# Altium PCB pcb.PcbDoc
Units mil, origin at the board's own origin, x right, y up, seen from the top; angles counter-clockwise.
Board outline 6000 x 4000 mil, 2 copper layers (Top Layer, Bottom Layer); 96 components, 60 nets, 327 pads, 0 vias.
Unrouted connection lines stored in the file: 201.
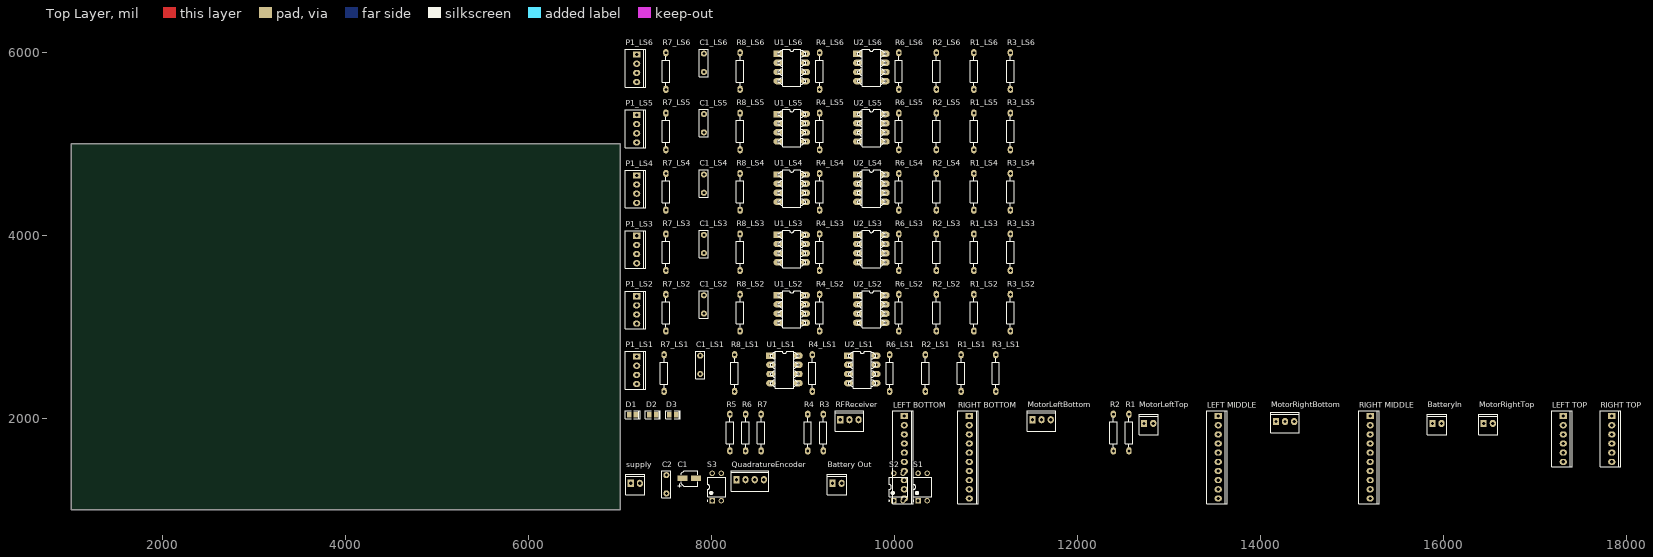
[diagram p0: Top Layer view]
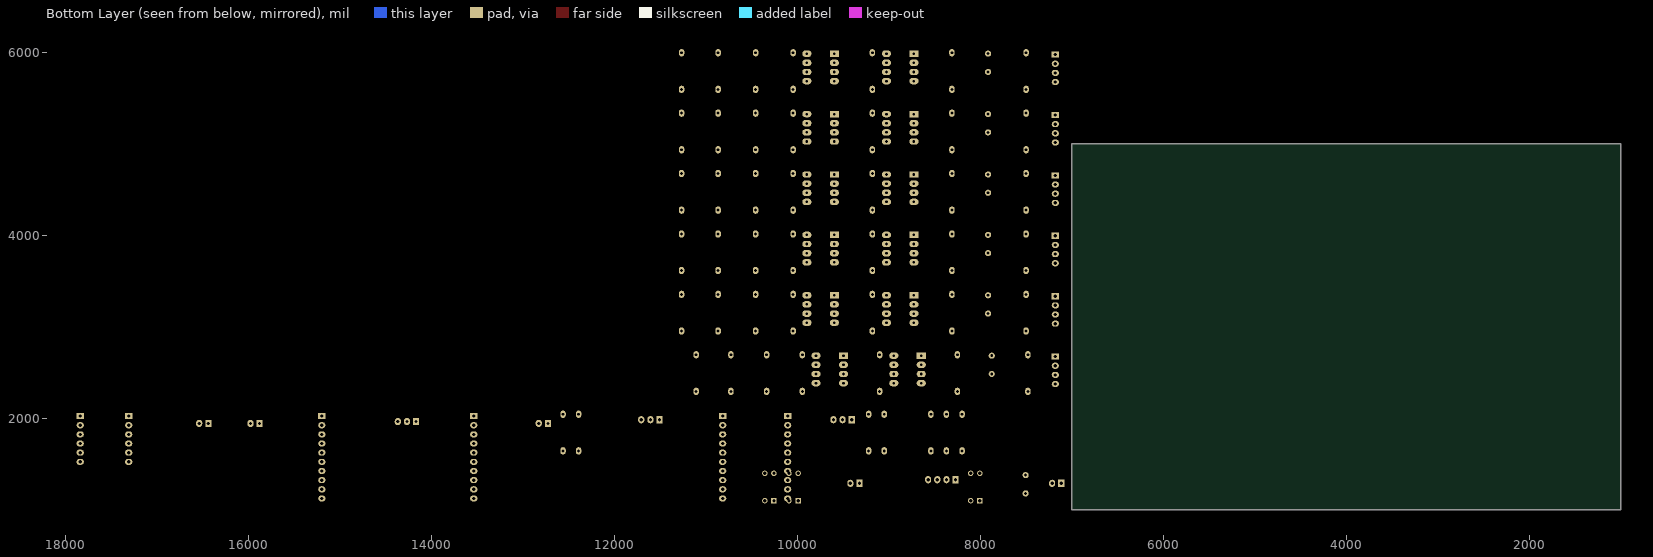
[diagram p1: Bottom Layer view, seen from below]

## Layer stack, top to bottom
Top Solder: solder mask 0.4, Solder Resist, Dk 3.5
Top Layer: signal copper 1.4
Dielectric 1: dielectric 12.6, FR-4, Dk 4.8
Bottom Layer: signal copper 1.4
Bottom Solder: solder mask 0.4, Solder Resist, Dk 3.5

## Board outline
1000,1000 7000,1000 7000,5000 1000,5000

## Design rules (kind name [scope] priority, off if disabled: settings)
Clearance [All] p1: gap=10
PolygonConnect [All] p1: connectstyle=Relief reliefconductorwidth=10 reliefentries=4 polygonreliefangle="90 Angle" airgapwidth=10
RoomDefinition schematic [InComponentClass('schematic')] p1: confinementstyle=ConfineIn formatcopy=TRUE lockcomponents=FALSE outline 7045,1055 18245,1055 18245,2195 7045,2195
RoomDefinition LS6 [InComponentClass('LS6')] p2: confinementstyle=ConfineIn formatcopy=TRUE lockcomponents=FALSE outline 7045,5545 11585,5545 11585,6155 7045,6155
RoomDefinition LS5 [InComponentClass('LS5')] p3: confinementstyle=ConfineIn formatcopy=TRUE lockcomponents=FALSE outline 7045,4885 11585,4885 11585,5495 7045,5495
RoomDefinition LS4 [InComponentClass('LS4')] p4: confinementstyle=ConfineIn formatcopy=TRUE lockcomponents=FALSE outline 7045,4225 11585,4225 11585,4835 7045,4835
RoomDefinition LS3 [InComponentClass('LS3')] p5: confinementstyle=ConfineIn formatcopy=TRUE lockcomponents=FALSE outline 7045,3565 11585,3565 11585,4175 7045,4175
RoomDefinition LS2 [InComponentClass('LS2')] p6: confinementstyle=ConfineIn formatcopy=TRUE lockcomponents=FALSE outline 7045,2905 11585,2905 11585,3515 7045,3515
RoomDefinition LS1 [InComponentClass('LS1')] p7: confinementstyle=ConfineIn formatcopy=TRUE lockcomponents=FALSE outline 7045,2245 11405,2245 11405,2855 7045,2855
RoutingVias [All] p1: holewidth=28 width=50 viastyle="Through Hole" minholewidth=28 minwidth=50 maxholewidth=28 maxwidth=50
SolderMaskExpansion [All] p1: expansion=4
UnpouredPolygon [All] p1: allowunpoured=FALSE
Width [All] p1: maxlimit=10 minlimit=10 preferedwidth=10
29 further rules are at their usual default settings.

## Classes and differential pairs
component class LS1: C1_LS1 P1_LS1 R1_LS1 R2_LS1 R3_LS1 R4_LS1 R6_LS1 R7_LS1 R8_LS1 U1_LS1 U2_LS1
component class LS2: C1_LS2 P1_LS2 R1_LS2 R2_LS2 R3_LS2 R4_LS2 R6_LS2 R7_LS2 R8_LS2 U1_LS2 U2_LS2
component class LS3: C1_LS3 P1_LS3 R1_LS3 R2_LS3 R3_LS3 R4_LS3 R6_LS3 R7_LS3 R8_LS3 U1_LS3 U2_LS3
component class LS4: C1_LS4 P1_LS4 R1_LS4 R2_LS4 R3_LS4 R4_LS4 R6_LS4 R7_LS4 R8_LS4 U1_LS4 U2_LS4
component class LS5: C1_LS5 P1_LS5 R1_LS5 R2_LS5 R3_LS5 R4_LS5 R6_LS5 R7_LS5 R8_LS5 U1_LS5 U2_LS5
component class LS6: C1_LS6 P1_LS6 R1_LS6 R2_LS6 R3_LS6 R4_LS6 R6_LS6 R7_LS6 R8_LS6 U1_LS6 U2_LS6
component class schematic: "Battery Out" BatteryIn C1 C2 D1 D2 D3 "LEFT BOTTOM" "LEFT MIDDLE" "LEFT TOP" MotorLeftBottom MotorLeftTop MotorRightBottom MotorRightTop QuadratureEncoder R1 R2 R3 R4 R5 R6 R7 RFReceiver "RIGHT BOTTOM" "RIGHT MIDDLE" "RIGHT TOP" S1 S2 S3 supply
channel class light_sensor: LS1 LS2 LS3 LS4 LS5 LS6

## Components (designator, comment, footprint, x,y, rotation, side; value= is the part's Value field where it differs from the comment)
"Battery Out" "2 Way" ECE-600102STTH 9320,1290 r90 top
BatteryIn "2 Way" ECE-600102STTH 15875,1945 r90 top
C1 "100uF" ECE-CAPAE4X5.4SM 7755,1345 r0 top
C1_LS1 "1.5n" ECE-CAPR0.2x0.1TH 7875,2485 r90 top (schematic designator C1)
C1_LS2 "1.5n" ECE-CAPR0.2x0.1TH 7915,3145 r90 top (schematic designator C1)
C1_LS3 "1.5n" ECE-CAPR0.2x0.1TH 7915,3805 r90 top (schematic designator C1)
C1_LS4 "1.5n" ECE-CAPR0.2x0.1TH 7915,4465 r90 top (schematic designator C1)
C1_LS5 "1.5n" ECE-CAPR0.2x0.1TH 7915,5125 r90 top (schematic designator C1)
C1_LS6 "1.5n" ECE-CAPR0.2x0.1TH 7915,5785 r90 top (schematic designator C1)
C2 "0.1u" ECE-CAPR0.2x0.1TH 7505,1180 r90 top
D1 "LTST-C170KAKT" ECE-LED2012-0805SM 7135,2040 r0 top
D2 "LTST-C170KAKT" ECE-LED2012-0805SM 7355,2040 r0 top
D3 "LTST-C170KAKT" ECE-LED2012-0805SM 7575,2040 r0 top
"LEFT BOTTOM" "10 Way" ECE-600110STTH 10105,2025 r0 top
"LEFT MIDDLE" "10 Way" ECE-600110STTH 13535,2025 r0 top
"LEFT TOP" "6 Way" ECE-600106STTH 17305,2025 r0 top
MotorLeftBottom "3 Way" ECE-600103STTH 11505,1985 r90 top
MotorLeftTop "2 Way" ECE-600102STTH 12725,1945 r90 top
MotorRightBottom "3 Way" ECE-600103STTH 14165,1965 r90 top
MotorRightTop "2 Way" ECE-600102STTH 16435,1945 r90 top
P1_LS1 "Phototransistor" ECE-600104STTH 7180,2675 r0 top (schematic designator P1)
P1_LS2 "Phototransistor" ECE-600104STTH 7180,3335 r0 top (schematic designator P1)
P1_LS3 "Phototransistor" ECE-600104STTH 7180,3995 r0 top (schematic designator P1)
P1_LS4 "Phototransistor" ECE-600104STTH 7180,4655 r0 top (schematic designator P1)
P1_LS5 "Phototransistor" ECE-600104STTH 7180,5315 r0 top (schematic designator P1)
P1_LS6 "Phototransistor" ECE-600104STTH 7180,5975 r0 top (schematic designator P1)
QuadratureEncoder "4 Way" ECE-600104STTH 8270,1330 r90 top
R1 "100k" ECE-RESA0.4TH 12560,1645 r90 top
R1_LS1 "100k" ECE-RESA0.4TH 10725,2295 r90 top (schematic designator R1)
R1_LS2 "100k" ECE-RESA0.4TH 10865,2955 r90 top (schematic designator R1)
R1_LS3 "100k" ECE-RESA0.4TH 10865,3615 r90 top (schematic designator R1)
R1_LS4 "100k" ECE-RESA0.4TH 10865,4275 r90 top (schematic designator R1)
R1_LS5 "100k" ECE-RESA0.4TH 10865,4935 r90 top (schematic designator R1)
R1_LS6 "100k" ECE-RESA0.4TH 10865,5595 r90 top (schematic designator R1)
R2 "100k" ECE-RESA0.4TH 12390,1645 r90 top
R2_LS1 "100k" ECE-RESA0.4TH 10335,2295 r90 top (schematic designator R2)
R2_LS2 "100k" ECE-RESA0.4TH 10455,2955 r90 top (schematic designator R2)
R2_LS3 "100k" ECE-RESA0.4TH 10455,3615 r90 top (schematic designator R2)
R2_LS4 "100k" ECE-RESA0.4TH 10455,4275 r90 top (schematic designator R2)
R2_LS5 "100k" ECE-RESA0.4TH 10455,4935 r90 top (schematic designator R2)
R2_LS6 "100k" ECE-RESA0.4TH 10455,5595 r90 top (schematic designator R2)
R3 "100k" ECE-RESA0.4TH 9220,1645 r90 top
R3_LS1 "100k" ECE-RESA0.4TH 11105,2295 r90 top (schematic designator R3)
R3_LS2 "100k" ECE-RESA0.4TH 11265,2955 r90 top (schematic designator R3)
R3_LS3 "100k" ECE-RESA0.4TH 11265,3615 r90 top (schematic designator R3)
R3_LS4 "100k" ECE-RESA0.4TH 11265,4275 r90 top (schematic designator R3)
R3_LS5 "100k" ECE-RESA0.4TH 11265,4935 r90 top (schematic designator R3)
R3_LS6 "100k" ECE-RESA0.4TH 11265,5595 r90 top (schematic designator R3)
R4 "100k" ECE-RESA0.4TH 9050,1645 r90 top
R4_LS1 "100k" ECE-RESA0.4TH 9100,2295 r90 top (schematic designator R4)
R4_LS2 "100k" ECE-RESA0.4TH 9180,2955 r90 top (schematic designator R4)
R4_LS3 "100k" ECE-RESA0.4TH 9180,3615 r90 top (schematic designator R4)
R4_LS4 "100k" ECE-RESA0.4TH 9180,4275 r90 top (schematic designator R4)
R4_LS5 "100k" ECE-RESA0.4TH 9180,4935 r90 top (schematic designator R4)
R4_LS6 "100k" ECE-RESA0.4TH 9180,5595 r90 top (schematic designator R4)
R5 "1" ECE-RESA0.4TH 8200,1645 r90 top
R6 "1" ECE-RESA0.4TH 8370,1645 r90 top
R6_LS1 "1M" ECE-RESA0.4TH 9945,2295 r90 top (schematic designator R6)
R6_LS2 "1M" ECE-RESA0.4TH 10045,2955 r90 top (schematic designator R6)
R6_LS3 "1M" ECE-RESA0.4TH 10045,3615 r90 top (schematic designator R6)
R6_LS4 "1M" ECE-RESA0.4TH 10045,4275 r90 top (schematic designator R6)
R6_LS5 "1M" ECE-RESA0.4TH 10045,4935 r90 top (schematic designator R6)
R6_LS6 "1M" ECE-RESA0.4TH 10045,5595 r90 top (schematic designator R6)
R7 "1" ECE-RESA0.4TH 8540,1645 r90 top
R7_LS1 "1M" ECE-RESA0.4TH 7480,2295 r90 top (schematic designator R7)
R7_LS2 "1M" ECE-RESA0.4TH 7500,2955 r90 top (schematic designator R7)
R7_LS3 "1M" ECE-RESA0.4TH 7500,3615 r90 top (schematic designator R7)
R7_LS4 "1M" ECE-RESA0.4TH 7500,4275 r90 top (schematic designator R7)
R7_LS5 "1M" ECE-RESA0.4TH 7500,4935 r90 top (schematic designator R7)
R7_LS6 "1M" ECE-RESA0.4TH 7500,5595 r90 top (schematic designator R7)
R8_LS1 "100k" ECE-RESA0.4TH 8250,2295 r90 top (schematic designator R8)
R8_LS2 "100k" ECE-RESA0.4TH 8310,2955 r90 top (schematic designator R8)
R8_LS3 "100k" ECE-RESA0.4TH 8310,3615 r90 top (schematic designator R8)
R8_LS4 "100k" ECE-RESA0.4TH 8310,4275 r90 top (schematic designator R8)
R8_LS5 "100k" ECE-RESA0.4TH 8310,4935 r90 top (schematic designator R8)
R8_LS6 "100k" ECE-RESA0.4TH 8310,5595 r90 top (schematic designator R8)
RFReceiver "3 Way" ECE-600103STTH 9405,1985 r90 top
"RIGHT BOTTOM" "10 Way" ECE-600110STTH 10815,2025 r0 top
"RIGHT MIDDLE" "10 Way" ECE-600110STTH 15195,2025 r0 top
"RIGHT TOP" "6 Way" ECE-600106STTH 17835,2025 r0 top
S1 "SW DIP-2" DIP-4 10305,1250 r90 top
S2 "SW DIP-2" DIP-4 10040,1250 r90 top
S3 "SW DIP-2" DIP-4 8055,1250 r90 top
supply "2 Way" ECE-600102STTH 7115,1290 r90 top
U1_LS1 "LM358" ECE-DIP8TH 8645,2685 r0 top (schematic designator U1)
U1_LS2 "LM358" ECE-DIP8TH 8725,3345 r0 top (schematic designator U1)
U1_LS3 "LM358" ECE-DIP8TH 8725,4005 r0 top (schematic designator U1)
U1_LS4 "LM358" ECE-DIP8TH 8725,4665 r0 top (schematic designator U1)
U1_LS5 "LM358" ECE-DIP8TH 8725,5325 r0 top (schematic designator U1)
U1_LS6 "LM358" ECE-DIP8TH 8725,5985 r0 top (schematic designator U1)
U2_LS1 "LM358" ECE-DIP8TH 9495,2685 r0 top (schematic designator U2)
U2_LS2 "LM358" ECE-DIP8TH 9595,3345 r0 top (schematic designator U2)
U2_LS3 "LM358" ECE-DIP8TH 9595,4005 r0 top (schematic designator U2)
U2_LS4 "LM358" ECE-DIP8TH 9595,4665 r0 top (schematic designator U2)
U2_LS5 "LM358" ECE-DIP8TH 9595,5325 r0 top (schematic designator U2)
U2_LS6 "LM358" ECE-DIP8TH 9595,5985 r0 top (schematic designator U2)

## Footprints (in the part's own frame and the unit in brackets; to place one, negate y for a bottom-side part, rotate by r counter-clockwise, add the part's x,y. Pads: shape width x height; smd on the part's side, far side on the other; paste and mask are expansions set on the pad)
DIP-4 [mm] "DIP; 4 Leads; Row Spacing 7.62 mm; Pitch 2.54 mm"
  rect 1.5x1.5 hole 0.9: 1(-3.81,1.27)
  round 1.5 hole 0.9: 2(-3.81,-1.27) 3(3.81,-1.27) 4(3.81,1.27)
  silkscreen extent -3.93,-2.55 2.65,2.69, body extent -3.15,-2.5 3.15,2.5, height 5.6
ECE-600102STTH [mm] "Polarised Header 2 way"
  rect 2x1.7 hole 0.9: 1(0,0)
  oval 2x1.7 hole 0.9: 2(0,-2.54)
  silkscreen extent -3.16,-3.96 2.54,1.42, body extent -3.3,-3.64 3.17,1.44, height 7.39
ECE-600103STTH [mm] "Polarised Header 3 way"
  rect 2x1.7 hole 0.9: 1(0,0)
  oval 2x1.7 hole 0.9: 2(0,-2.54) 3(0,-5.08)
  silkscreen extent -3.16,-6.5 2.54,1.42
ECE-600104STTH [mm] "Polarised Header 4 way"
  rect 2x1.7 hole 0.9: 1(0,0)
  oval 2x1.7 hole 0.9: 2(0,-2.54) 3(0,-5.08) 4(0,-7.62)
  silkscreen extent -3.16,-9.04 2.54,1.42
ECE-600106STTH [mm] "Polarised Header 6 way"
  rect 2x1.7 hole 0.9: 1(0,0)
  oval 2x1.7 hole 0.9: 2(0,-2.54) 3(0,-5.08) 4(0,-7.62) 5(0,-10.16) 6(0,-12.7)
  silkscreen extent -3.16,-14.12 2.54,1.42
ECE-600110STTH [mm] "Polarised Header 10 way"
  rect 2x1.7 hole 0.9: 1(0,0)
  oval 2x1.7 hole 0.9: 2(0,-2.54) 3(0,-5.08) 4(0,-7.62) 5(0,-10.16) 6(0,-12.7) 7(0,-15.24) 8(0,-17.78) 9(0,-20.32) 10(0,-22.86)
  silkscreen extent -3.16,-24.28 2.54,1.42
ECE-CAPAE4X5.4SM [mm] "Capacitor, polarized, aluminum can; 4x5.4mm DxH"
  rect 2.8x1.6 smd: 1(-1.9,0) 2(1.9,0)
  silkscreen extent -3.2,-2.5 2.29,2.16
ECE-CAPR0.2x0.1TH [mm] "Radial non polarised Capacitor"
  round 1.7 hole 0.8: 1(0,0) 2(5.08,0)
  silkscreen extent -1.27,-1.27 6.35,1.27
ECE-DIP8TH [mil] "8 pin Dual in line"
  rect 100x70 hole 28: 1(0,0)
  oval 100x70 hole 28: 2(0,-100) 3(0,-200) 4(0,-300) 5(300,-300) 6(300,-200) 7(300,-100) 8(300,0)
  silkscreen extent 0,-357 300,50
ECE-LED2012-0805SM [mm] "RED AS AlGaAs SMD LED, Body; 2mm x 1.25 mm (LxW)"
  rect 1.3x1.6 smd: 1(-0.95,0) 2(0.95,0)
  silkscreen extent -2,-1.15 2.13,1.15
ECE-RESA0.4TH [mil] "Resistor Axial 10mm"
  oval 80x60 hole 31.5: 1(0.16,0.32) 2(400.16,0.32)
  silkscreen extent 40,-40 360,40, body extent -7,-47 417,47, height 95

## Part data
"Battery Out" BatteryIn MotorLeftTop MotorRightTop supply: library part CON000001, "HEADER POLARISED 2WAY TH"
C1: library part CAP000301, "CAP 1uF 50V ELE SM"
C1_LS1 C1_LS2 C1_LS3 C1_LS4 C1_LS5 C1_LS6 C2: library part CAP000001, "CAP CER 10pF 50V TH"
D1 D2 D3: library part DIO000105, "LED RED ORANGE CLEAR 0805 SMD"
"LEFT BOTTOM" "LEFT MIDDLE" "RIGHT BOTTOM" "RIGHT MIDDLE": library part CON000006, "HEADER POLARISED 10WAY TH"
"LEFT TOP" "RIGHT TOP": library part CON000004, "HEADER POLARISED 6WAY TH"
MotorLeftBottom MotorRightBottom RFReceiver: library part CON000002, "HEADER POLARISED 3WAY TH"
P1_LS1 P1_LS2 P1_LS3 P1_LS4 P1_LS5 P1_LS6 QuadratureEncoder: library part CON000003, "HEADER POLARISED 4WAY TH"
R1 R1_LS1 R1_LS2 R1_LS3 R1_LS4 R1_LS5 R1_LS6 R2 R2_LS1 R2_LS2 R2_LS3 R2_LS4 R2_LS5 R2_LS6 R3 R3_LS1 R3_LS2 R3_LS3 R3_LS4 R3_LS5 R3_LS6 R4 R4_LS1 R4_LS2 R4_LS3 R4_LS4 R4_LS5 R4_LS6 R5 R6 R6_LS1 R6_LS2 R6_LS3 R6_LS4 R6_LS5 R6_LS6 R7 R7_LS1 R7_LS2 R7_LS3 R7_LS4 R7_LS5 R7_LS6 R8_LS1 R8_LS2 R8_LS3 R8_LS4 R8_LS5 R8_LS6: library part RES000001, "RES MF 1R TH"
S1 S2 S3: "DIP Switch, 2 Position, SPST"
U1_LS1 U1_LS2 U1_LS3 U1_LS4 U1_LS5 U1_LS6 U2_LS1 U2_LS2 U2_LS3 U2_LS4 U2_LS5 U2_LS6: library part OPA000005, "IC OPAMP LM358 DUAL TH"

## Nets (pads, with @x,y where several pads share a name; then routed paths per layer and width w, separated by ;. In a path a pad name is that pad's centre, name@x,y a point inside that pad or via, vN(x,y) a via of type N, cw(c..) or ccw(c..) an arc to the next point about the centre after c; other vN are vias at no path point)
GND: "Battery Out.2" "LEFT BOTTOM.2" "RIGHT TOP.2" BatteryIn.1 C1.2 C2.2 P1_LS1.2 P1_LS1.3 P1_LS1.4 P1_LS2.2 P1_LS2.3 P1_LS2.4 P1_LS3.2 P1_LS3.3 P1_LS3.4 P1_LS4.2 P1_LS4.3 P1_LS4.4 P1_LS5.2 P1_LS5.3 P1_LS5.4 P1_LS6.2 P1_LS6.3 P1_LS6.4 R2.1 R4.1 R4_LS1.1 R4_LS2.1 R4_LS3.1 R4_LS4.1 R4_LS5.1 R4_LS6.1 R7_LS1.1 R7_LS2.1 R7_LS3.1 R7_LS4.1 R7_LS5.1 R7_LS6.1 RFReceiver.1 S3.4 supply.2 U1_LS1.4 U1_LS2.4 U1_LS3.4 U1_LS4.4 U1_LS5.4 U1_LS6.4 U2_LS1.4 U2_LS2.4 U2_LS3.4 U2_LS4.4 U2_LS5.4 U2_LS6.4
NetBatteryIn_2: "Battery Out.1" BatteryIn.2 R1.2
NetC1_LS1_1: C1_LS1.1 R6_LS1.1 R7_LS1.2 U1_LS1.3
NetC1_LS1_2: C1_LS1.2 P1_LS1.1 R8_LS1.1
NetC1_LS2_1: C1_LS2.1 R6_LS2.1 R7_LS2.2 U1_LS2.3
NetC1_LS2_2: C1_LS2.2 P1_LS2.1 R8_LS2.1
NetC1_LS3_1: C1_LS3.1 R6_LS3.1 R7_LS3.2 U1_LS3.3
NetC1_LS3_2: C1_LS3.2 P1_LS3.1 R8_LS3.1
NetC1_LS4_1: C1_LS4.1 R6_LS4.1 R7_LS4.2 U1_LS4.3
NetC1_LS4_2: C1_LS4.2 P1_LS4.1 R8_LS4.1
NetC1_LS5_1: C1_LS5.1 R6_LS5.1 R7_LS5.2 U1_LS5.3
NetC1_LS5_2: C1_LS5.2 P1_LS5.1 R8_LS5.1
NetC1_LS6_1: C1_LS6.1 R6_LS6.1 R7_LS6.2 U1_LS6.3
NetC1_LS6_2: C1_LS6.2 P1_LS6.1 R8_LS6.1
NetD1_1: D1.1 R5.1
NetD1_2: D1.2 D2.2 D3.2 S3.1
NetD2_1: D2.1 R6.1
NetD3_1: D3.1 R7.1
"NetLEFT BOTTOM_4": "LEFT BOTTOM.4" R3.1 R4.2
"NetLEFT BOTTOM_7": "LEFT BOTTOM.7" QuadratureEncoder.4
"NetLEFT BOTTOM_8": "LEFT BOTTOM.8" QuadratureEncoder.3
"NetLEFT BOTTOM_10": "LEFT BOTTOM.10" QuadratureEncoder.2
"NetLEFT MIDDLE_1": "LEFT MIDDLE.1" QuadratureEncoder.1
"NetLEFT MIDDLE_7": "LEFT MIDDLE.7" S2.2
"NetLEFT MIDDLE_10": "LEFT MIDDLE.10" S2.1
"NetLEFT TOP_1": "LEFT TOP.1" S1.2
"NetLEFT TOP_2": "LEFT TOP.2" S1.1
NetMotorLeftBottom_1: "RIGHT BOTTOM.7" MotorLeftBottom.1
NetMotorLeftBottom_2: "RIGHT BOTTOM.6" MotorLeftBottom.2
NetMotorLeftBottom_3: "RIGHT BOTTOM.5" MotorLeftBottom.3
NetMotorLeftTop_1: "RIGHT BOTTOM.4" MotorLeftTop.1
NetMotorLeftTop_2: "RIGHT BOTTOM.3" MotorLeftTop.2
NetMotorRightBottom_1: "RIGHT MIDDLE.9" MotorRightBottom.1
NetMotorRightBottom_2: "RIGHT MIDDLE.8" MotorRightBottom.2
NetMotorRightBottom_3: "RIGHT MIDDLE.7" MotorRightBottom.3
NetMotorRightTop_1: "RIGHT MIDDLE.6" MotorRightTop.1
NetMotorRightTop_2: "RIGHT MIDDLE.5" MotorRightTop.2
NetR1_1: R1.1 R2.2
NetR1_LS1_1: R1_LS1.1 R2_LS1.2 U2_LS1.2
NetR1_LS1_2: R1_LS1.2 R1_LS2.2 R1_LS3.2 R1_LS4.2 R1_LS5.2 R1_LS6.2 U2_LS1.1 U2_LS2.1 U2_LS3.1 U2_LS4.1 U2_LS5.1 U2_LS6.1
NetR1_LS2_1: R1_LS2.1 R2_LS2.2 U2_LS2.2
NetR1_LS3_1: R1_LS3.1 R2_LS3.2 U2_LS3.2
NetR1_LS4_1: R1_LS4.1 R2_LS4.2 U2_LS4.2
NetR1_LS5_1: R1_LS5.1 R2_LS5.2 U2_LS5.2
NetR1_LS6_1: R1_LS6.1 R2_LS6.2 U2_LS6.2
NetR2_LS1_1: R2_LS1.1 R3_LS1.1 R4_LS1.2
NetR2_LS2_1: R2_LS2.1 R3_LS2.1 R4_LS2.2
NetR2_LS3_1: R2_LS3.1 R3_LS3.1 R4_LS3.2
NetR2_LS4_1: R2_LS4.1 R3_LS4.1 R4_LS4.2
NetR2_LS5_1: R2_LS5.1 R3_LS5.1 R4_LS5.2
NetR2_LS6_1: R2_LS6.1 R3_LS6.1 R4_LS6.2
NetRFReceiver_3: "RIGHT BOTTOM.8" RFReceiver.3
NetS3_3: S3.3 supply.1
NetU1_LS1_1: U1_LS1.1 U1_LS1.2 U2_LS1.3
NetU1_LS2_1: U1_LS2.1 U1_LS2.2 U2_LS2.3
NetU1_LS3_1: U1_LS3.1 U1_LS3.2 U2_LS3.3
NetU1_LS4_1: U1_LS4.1 U1_LS4.2 U2_LS4.3
NetU1_LS5_1: U1_LS5.1 U1_LS5.2 U2_LS5.3
NetU1_LS6_1: U1_LS6.1 U1_LS6.2 U2_LS6.3
VCC: C1.1 C2.1 R3.2 R3_LS1.2 R3_LS2.2 R3_LS3.2 R3_LS4.2 R3_LS5.2 R3_LS6.2 R5.2 R6.2 R6_LS1.2 R6_LS2.2 R6_LS3.2 R6_LS4.2 R6_LS5.2 R6_LS6.2 R7.2 R8_LS1.2 R8_LS2.2 R8_LS3.2 R8_LS4.2 R8_LS5.2 R8_LS6.2 RFReceiver.2 S1.3 S1.4 S2.3 S2.4 S3.2 U1_LS1.8 U1_LS2.8 U1_LS3.8 U1_LS4.8 U1_LS5.8 U1_LS6.8 U2_LS1.8 U2_LS2.8 U2_LS3.8 U2_LS4.8 U2_LS5.8 U2_LS6.8
pads on no net: "LEFT BOTTOM.1" "LEFT BOTTOM.3" "LEFT BOTTOM.5" "LEFT BOTTOM.6" "LEFT BOTTOM.9" "LEFT MIDDLE.2" "LEFT MIDDLE.3" "LEFT MIDDLE.4" "LEFT MIDDLE.5" "LEFT MIDDLE.6" "LEFT MIDDLE.8" "LEFT MIDDLE.9" "LEFT TOP.3" "LEFT TOP.4" "LEFT TOP.5" "LEFT TOP.6" "RIGHT BOTTOM.1" "RIGHT BOTTOM.2" "RIGHT BOTTOM.9" "RIGHT BOTTOM.10" "RIGHT MIDDLE.1" "RIGHT MIDDLE.2" "RIGHT MIDDLE.3" "RIGHT MIDDLE.4" "RIGHT MIDDLE.10" "RIGHT TOP.1" "RIGHT TOP.3" "RIGHT TOP.4" "RIGHT TOP.5" "RIGHT TOP.6" U1_LS1.5 U1_LS1.6 U1_LS1.7 U1_LS2.5 U1_LS2.6 U1_LS2.7 U1_LS3.5 U1_LS3.6 U1_LS3.7 U1_LS4.5 U1_LS4.6 U1_LS4.7 U1_LS5.5 U1_LS5.6 U1_LS5.7 U1_LS6.5 U1_LS6.6 U1_LS6.7 U2_LS1.5 U2_LS1.6 U2_LS1.7 U2_LS2.5 U2_LS2.6 U2_LS2.7 U2_LS3.5 U2_LS3.6 U2_LS3.7 U2_LS4.5 U2_LS4.6 U2_LS4.7 U2_LS5.5 U2_LS5.6 U2_LS5.7 U2_LS6.5 U2_LS6.6 U2_LS6.7